# Altium PCB advsensor.PcbDoc (part 2 of 2)
Units mil, origin at the board's own origin, x right, y up, seen from the top; angles counter-clockwise.
Board outline 6000 x 4000 mil, 4 copper layers (Top Layer, Mid-Layer 1, Mid-Layer 2, Bottom Layer); 107 components, 107 nets, 544 pads, 87 vias.
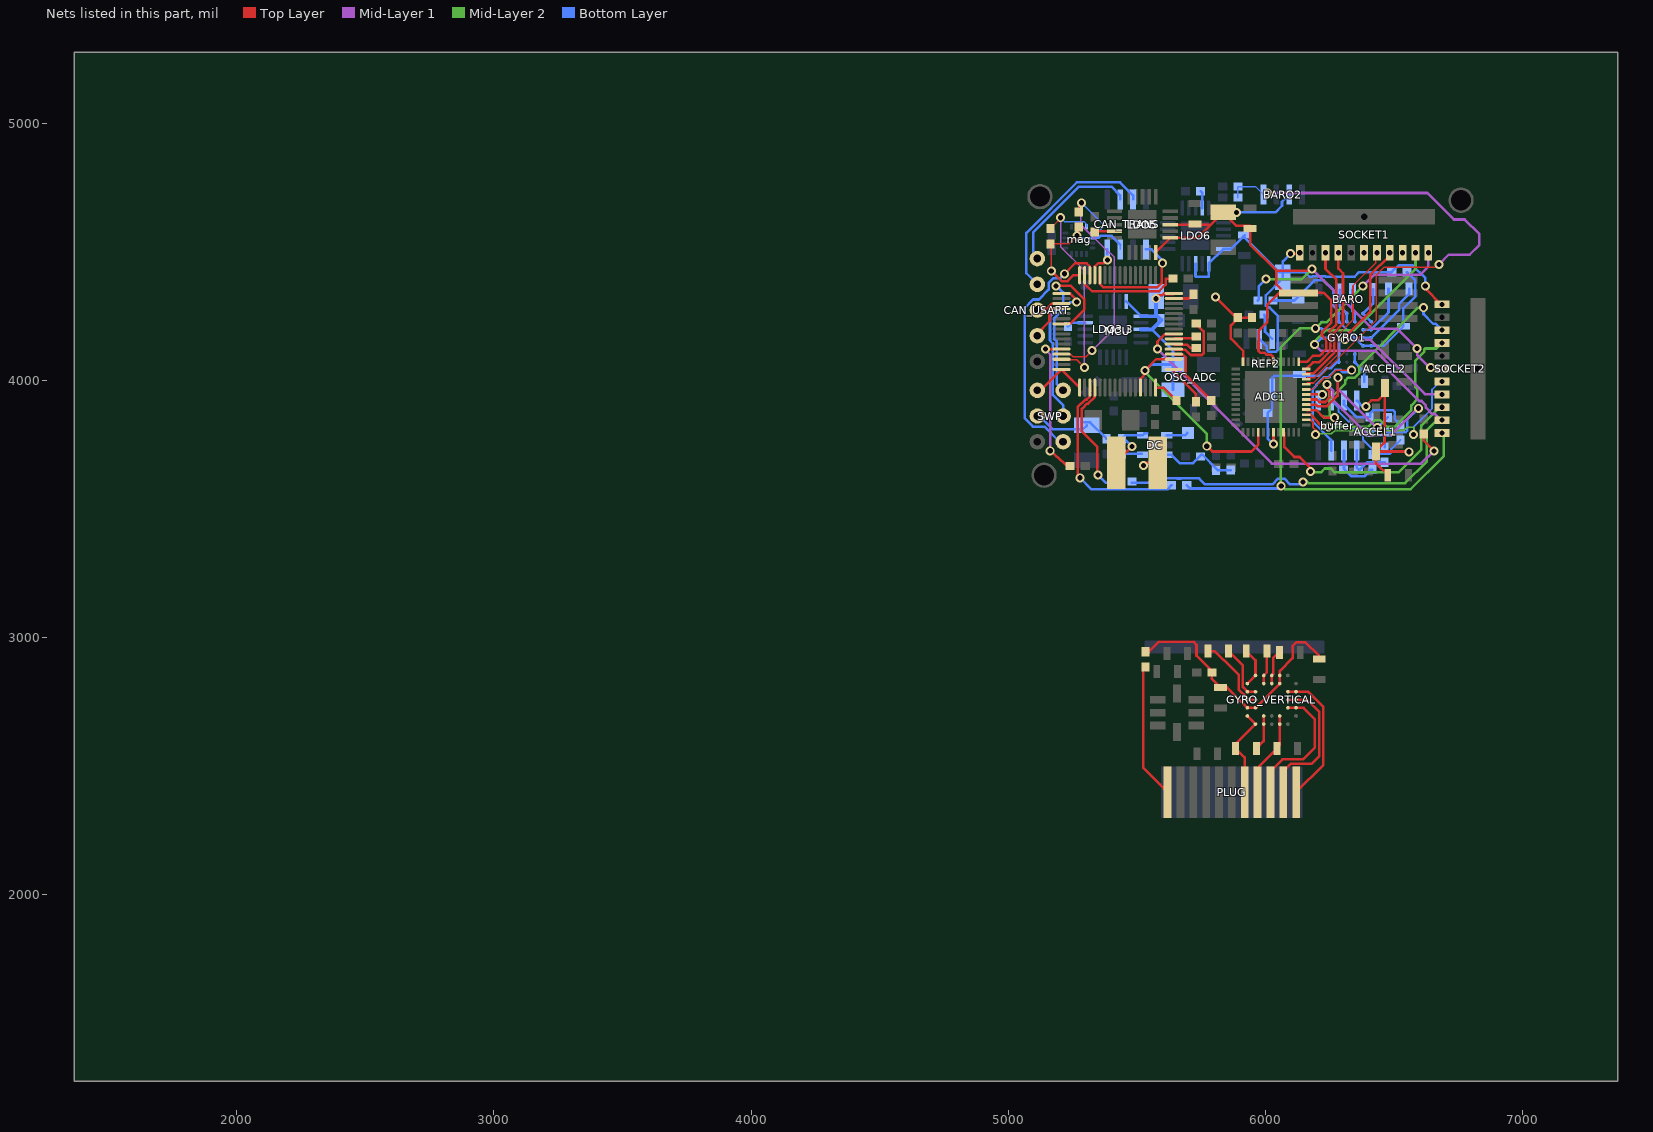
[diagram p4: the nets of this part, all layers, seen from the top]

## Via types
v1: diameter 35, hole 20, Top Layer to Bottom Layer, 87 vias

## Nets (pads, with @x,y where several pads share a name; then routed paths per layer and width w, separated by ;. In a path a pad name is that pad's centre, name@x,y a point inside that pad or via, vN(x,y) a via of type N, cw(c..) or ccw(c..) an arc to the next point about the centre after c; other vN are vias at no path point) (continued)
NetADC1_31: ADC1.31 C_GYRO1_REF.1 C_REF_2.1 GYRO1.E1 GYRO1.E2 REF2.6 SOCKET1.5 SOCKET2.5 | length 1598.1
  Top Layer w10: v1(6030.84,3751.84) ADC1.31@6030.84,3798.19 ; v1(6308,4158) 6299,4158 6406.5,4265.5 6406.5,4409.37 6483,4485.87 SOCKET1.5@6483,4492
  Mid-Layer 1 w10: v1(6308,4158) 6406.93,4158 6619,3945.93 SOCKET2.5@6685.07,3945.93
  Bottom Layer w10: v1(6030.84,3751.84) 6008.47,3774.21 C_REF_2.1@6008.47,3873 6026,3890.53 REF2.6@6026,3967 6026,4009 6034,4017 6209.61,4017 6229.54,4036.93 6229.54,4037.63 6238.92,4047 6254.95,4047 6278.46,4070.51 GYRO1.E1@6284.5,4070.51 GYRO1.E2@6284.5,4102.01 6287,4104.5 6287,4158 v1(6308,4158)
NetADC1_33: ADC1.33 SOCKET2.6 | length 892.9
  Top Layer w10: ADC1.33@6070.21,3798.19 6073.39,3795.01 6073.39,3740.36 6112,3701.75 6132.8,3701.75 6175.26,3659.29 v1(6175.26,3645.75)
  Mid-Layer 2 w10: v1(6175.26,3645.75) 6179.01,3642 6215.22,3642 6230.19,3656.97 6253.81,3656.97 6268.78,3642 6517,3642 6568.5,3693.5 6568.81,3693.5 6605.5,3730.2 6605.5,3824.58 6675.92,3895 SOCKET2.6@6686,3895
NetADC1_38: ADC1.38 SOCKET2.4 | length 790.2
  Top Layer w7: ADC1.38@6157.81,3846.39 6173.8,3846.39 6184.04,3836.15 6184.04,3818.14 6201,3801.19 6201,3786 6197.5,3789.5 v1(6193.89,3789.5)
  Mid-Layer 2 w7: v1(6193.89,3789.5) 6197.5,3789.5 6201,3786 6207,3792 6256.18,3792 6268.68,3804.5 6407.32,3804.5 6423.32,3788.5 6446.75,3788.5 6462.75,3804.5 6538.01,3804.5 6550.51,3817 6575,3817 6575.75,3816.25 v1(6575.75,3788.95)
  Bottom Layer w7: v1(6575.75,3788.95) 6575.75,3816.25 6575,3817 6646.97,3888.97 6646.97,3963.93 6678.04,3995 SOCKET2.4@6686,3995
NetADC1_39: ADC1.39 SOCKET2.3 | length 819.4
  Top Layer w10: ADC1.39@6157.81,3866.08 6175.92,3866.08 6185.54,3856.46 6185.54,3855.16 6220.2,3820.5 6243.5,3820.5 v1(6245,3819)
  Mid-Layer 2 w10: v1(6245,3819) 6397.69,3819 6422.7,3844 6446.31,3844 6471.31,3819 6500.39,3819 6566.5,3885.11 6566.5,3902.8 6590,3926.3 6590,3965.5 6581.5,3974 6581.5,4075.2 6617.5,4111.19 6617.5,4120.81 6620.19,4123.5 6664.5,4123.5 SOCKET2.3@6686,4145
NetADC1_40: ADC1.40 SOCKET2.2 | length 914.2
  Top Layer w10: ADC1.40@6157.81,3885.77 6160.11,3883.47 6198.53,3883.47 6224,3858 ; 6227.5,3854.5 v1(6267.48,3854.5)
  Mid-Layer 2 w10: v1(6267.48,3854.5) 6227.5,3854.5 6224,3858 6248.81,3858 6248.81,3926.18 6310.5,3987.87 6310.5,3999.5 6321,4010 6347.31,4010 6364,4026.69 6364,4050.3 6362.74,4051.57 6362.74,4051.74 6593,4282 v1(6614,4282)
  Bottom Layer w10: v1(6614,4282) 6614,4256.92 6651.92,4219 6662,4219 SOCKET2.2@6686,4195
NetADC1_41: ADC1.41 BUFFER-R4.2 C-Buffer.1 | length 576
  Top Layer w10: ADC1.41@6157.81,3905.46 6196.08,3905.46 6202.07,3899.47 6238.93,3899.47 6280,3940.54 6280,4012 v1(6282,4010)
  Mid-Layer 1 w10: v1(6282,4010) 6280,4012 6280,3967.44 6431.94,3815.5 v1(6434.5,3815.5)
  Bottom Layer w10: BUFFER-R4.2@6404,3797.47 6416.47,3797.47 v1(6434.5,3815.5) C-Buffer.1@6475,3856
NetADC1_42: ADC1.42 BUFFER-R3.2 C-Buffer.2 | length 904.7
  Top Layer w10: ADC1.42@6157.81,3925.15 6199.01,3925.15 6208.7,3915.47 6232.31,3915.47 6249,3932.17 6249,3955.78 6239.04,3965.73 v1(6239.04,3983.5)
  Mid-Layer 1 w10: v1(6239.04,3983.5) 6264,3958.54 6264,3921.37 6398.37,3787 6487.02,3787 6591.02,3891 v1(6595,3891)
  Bottom Layer w10: BUFFER-R3.2@6463,3740.53 6463,3784.47 C-Buffer.2@6475,3796.47 6476.34,3797.81 6544.3,3797.81 6550.75,3804.25 6550.75,3846.75 v1(6595,3891)
NetADC1_43: ADC1.43 buffer.5 | length 100.6
  Top Layer w10: ADC1.43@6157.81,3944.84 6219.63,3944.84 v1(6220.5,3943.97)
  Bottom Layer w10: buffer.5@6205,3922 6226.97,3943.97 v1(6220.5,3943.97)
NetADC1_44: ADC1.44 buffer.3 | length 684.3
  Top Layer w6: ADC1.44@6157.81,3964.53 6182.6,3964.53 6228.07,4010 6244.52,4010 6273.52,4039 v1(6335,4039)
  Top Layer w10: v1@6333.29,4031 6335,4032.71 v1(6335,4039)
  Bottom Layer w10: buffer.3@6255,3727 6255,3768.7 6183,3840.7 6183,3964.56 6198.04,3979.6 6198.04,3983.5 6198.74,3983.5 6227.24,4012 6248.62,4012 6249.95,4013.34 6249.95,4019.38 6271.08,4040.5 6291.81,4040.5 6301.31,4031 6333.29,4031 6335,4032.71 v1(6335,4039)
NetADC1_45: ADC1.45 BARO2.4 C-Baro2.2 R-Baro2.1 | length 2093.3
  Top Layer w6: ADC1.45@6157.81,3984.22 6162.99,3989.4 6186.36,3989.4 6431.01,4234.05 6431.01,4410.13 6460.44,4439.56 6663.56,4439.56 v1(6674,4450)
  Mid-Layer 1 w10: v1(6007,4728) 6629,4728 6732,4625 6774,4625 6831,4568 6831,4526 6793,4488 6712,4488 v1(6674,4450)
  Bottom Layer w6: C-Baro2.2@5892.53,4710 R-Baro2.1@5892.53,4753 5961,4753 BARO2.4@5992,4722
  Bottom Layer w10: v1(6007,4728) v1@6012,4728
NetADC1_46: ADC1.46 SOCKET1.4 | length 621.4
  Top Layer w6: ADC1.46@6157.81,4003.91 6162.99,4009.09 6189.08,4009.09 6281.5,4101.51 6281.5,4176.49 6340,4234.99 6340,4368 6429,4457 6429,4492 SOCKET1.4@6433,4496
NetADC1_47: ADC1.47 SOCKET1.3 | length 556.2
  Top Layer w10: ADC1.47@6157.81,4023.6 6160.99,4026.78 6186.97,4026.78 6267.5,4107.31 6267.5,4170.69 6265.25,4172.93 6265.25,4184.53 6301,4220.28 6301,4416 6283,4434 SOCKET1.3@6283,4496
NetADC1_48: ADC1.48 SOCKET1.2 | length 534
  Top Layer w10: ADC1.48@6157.81,4043.29 6184.02,4069.5 6207.06,4069.5 6251.5,4113.94 6251.5,4164.06 6249.25,4166.31 6249.25,4191.16 6275,4216.9 6275,4391 6233,4433 SOCKET1.2@6233,4496
NetADC-R1_2: ADC-R1.2 MCU.21 | length 251.1
  Top Layer w10: MCU.21@5646.28,4118.32 5688.13,4118.32 5708.2,4098.25 5752.75,4098.25 5759.19,4104.7 5759.19,4190.3 5730.47,4219.02 ADC-R1.2@5730.47,4220
NetADC-R2_2: ADC-R2.2 MCU.23 | length 87
  Top Layer w10: MCU.23@5646.28,4163.25 5723.72,4163.25 ADC-R2.2@5730.47,4170
NetADC-R3_2: ADC-R3.2 MCU.22 | length 89.6
  Top Layer w10: MCU.22@5646.28,4138.01 5695.82,4138.01 5708.83,4125 ADC-R3.2@5730.47,4125
NetADC-R4_1: ADC-R4.1 MCU.16 | length 102.1
  Top Layer w10: MCU.16@5572.64,3971.5 5604.03,3971.5 ADC-R4.1@5654,3921.53
NetADC-R5_1: ADC-R5.1 MCU.17 | length 156.2
  Top Layer w10: MCU.17@5643.5,4042.36 5643.5,4031.8 5729,3946.3 ADC-R5.1@5729,3921.53
NetADC-R6_1: ADC-R6.1 MCU.20 | length 259.9
  Top Layer w10: MCU.20@5643.5,4101.42 5646.28,4098.64 5680.03,4098.64 5689.94,4088.73 5689.94,4020.59 ADC-R6.1@5789,3921.53
Netbuffer_1: BUFFER-R2-1.2 BUFFER-R3.1 buffer.1 | length 190
  Bottom Layer w10: buffer.1@6355,3727 6355,3659.53 BUFFER-R2-1.2@6361.53,3653 6366.51,3653 6394.7,3681.19 6462.72,3681.19 BUFFER-R3.1@6463,3681.47
Netbuffer_2: BUFFER-R1.2 BUFFER-R2-1.1 buffer.2 | length 204.5
  Bottom Layer w10: buffer.2@6305,3727 6305,3655.53 6334.28,3626.25 6383.8,3626.25 6410.02,3652.47 BUFFER-R1.2@6415,3652.47
Netbuffer_6: BUFFER-R1.1 BUFFER-R2-2.2 buffer.6 | length 415.9
  Bottom Layer w8: buffer.6@6255,3921 6284,3892 6284,3876.87 6378.25,3782.62 6378.25,3769.76 6415,3733.01 BUFFER-R1.1@6415,3711.53 6416.28,3712.81 6482.89,3712.81 6488.75,3718.67 6488.75,3732.22 BUFFER-R2-2.2@6524,3767.47
Netbuffer_7: BUFFER-R2-2.1 BUFFER-R4.1 buffer.7 | length 310.8
  Bottom Layer w10: buffer.7@6305,3921 6305,3905.44 6353.92,3856.53 BUFFER-R4.1@6404,3856.53 ; BUFFER-R4.1@6406.47,3859 6406.47,3871.17 6418.5,3883.2 6453.65,3883.2 6454.7,3884.24 6495.3,3884.24 6501.75,3877.8 6501.75,3848.78 BUFFER-R2-2.1@6524,3826.53
NetC1_1: C1.1 GYRO_VERTICAL.A4 GYRO_VERTICAL.B4 | length 300.5
  Top Layer w10: C1.1@5776,2947 5801.94,2947 5837.94,2911 5840,2911 5895.51,2855.49 5895.51,2798.04 5929.51,2764.04 GYRO_VERTICAL.A4@5929.51,2758 GYRO_VERTICAL.B4@5961.01,2758
NetC1_2: C1.2 GYRO_VERTICAL.A5 GYRO_VERTICAL.B5 | length 219.4
  Top Layer w10: C1.2@5856,2947 5911.51,2891.49 5911.51,2807.5 GYRO_VERTICAL.A5@5929.51,2789.5 GYRO_VERTICAL.B5@5961.01,2789.5
NetC2_1: C2.1 GYRO_VERTICAL.A6 GYRO_VERTICAL.B7 | length 154
  Top Layer w10: C2.1@5925,2947 5961.01,2910.99 GYRO_VERTICAL.B7@5961.01,2852.49 GYRO_VERTICAL.A6@5929.51,2820.99
NetC2_2: C2.2 GYRO_VERTICAL.C6 GYRO_VERTICAL.C7 | length 131.2
  Top Layer w10: GYRO_VERTICAL.C6@5992.5,2820.99 GYRO_VERTICAL.C7@5992.5,2852.49 6005,2864.98 C2.2@6005,2947
NetC3_2: C3.2 GYRO_VERTICAL.D6 GYRO_VERTICAL.D7 | length 140.7
  Top Layer w10: GYRO_VERTICAL.D6@6024,2820.99 GYRO_VERTICAL.D7@6024,2852.49 6029.5,2857.99 6029.5,2920.5 C3.2@6057,2948
NetC4_1: C4.1 GYRO_VERTICAL.C1 GYRO_VERTICAL.C2 | length 137.8
  Top Layer w10: C4.1@5964,2569 5992.5,2597.5 GYRO_VERTICAL.C1@5992.5,2663.51 GYRO_VERTICAL.C2@5992.5,2695.01
NetC4_2: C4.2 GYRO_VERTICAL.A2 GYRO_VERTICAL.B1 PLUG.4 | length 355.4
  Top Layer w6: C4.2@5884,2569 C4.2@5884,2586.5
  Top Layer w10: C4.2@5884,2569 5919,2534 PLUG.4@5919,2399 ; C4.2@5884,2586.5 GYRO_VERTICAL.B1@5961.01,2663.51 GYRO_VERTICAL.A2@5929.51,2695.01
NetC_DC3_1: C_DC3.1 DC.3 R_DC2.1 R_DC3.2 | length 301.3
  Bottom Layer w10: DC.3@5616.01,3710.95 5632.62,3710.95 5665.97,3677.61 5718.4,3677.61 5751.75,3710.95 5753.89,3710.95 5814.02,3650.83 C_DC3.1@5864.77,3650.83
NetC_GYRO_AVCC_1: C_GYRO_AVCC.1 C_GYRO_VDD.1 GYRO_VERTICAL.A3 GYRO_VERTICAL.B3 GYRO_VERTICAL.E6 GYRO_VERTICAL.E7 vert5v.2 vert6v.1 | length 1043.5
  Top Layer w6: vert6v.1@5527,2942.53 vert6v.1@5543.53,2942.53 ; 5791.53,2839.47 5791.53,2843 ; C_GYRO_AVCC.1@5825,2806 5850.02,2806
  Top Layer w10: vert6v.1@5543.53,2942.53 5585,2984 5719.2,2984 5731.5,2971.7 5731.5,2929.5 5791.53,2869.47 5791.53,2843 ; 5791.53,2839.47 C_GYRO_AVCC.1@5825,2806 ; 5850.02,2806 GYRO_VERTICAL.A3@5929.51,2726.5 GYRO_VERTICAL.B3@5961.01,2726.5 GYRO_VERTICAL.E6@6055.5,2820.99 GYRO_VERTICAL.E7@6055.5,2852.49 6055.5,2870.5 6105,2920 6105,2967.23 6119.77,2982 6154.23,2982 6209,2927.23 C_GYRO_VDD.1@6209,2917
NetC_GYRO_REF_1: C_GYRO_REF.1 GYRO_VERTICAL.E1 GYRO_VERTICAL.E2 PLUG.5 | length 331.8
  Top Layer w6: C_GYRO_REF.1@6045,2569 C_GYRO_REF.1@6055.5,2579.5
  Top Layer w10: PLUG.5@5969,2399 5969,2493 C_GYRO_REF.1@6045,2569 ; C_GYRO_REF.1@6055.5,2579.5 GYRO_VERTICAL.E1@6055.5,2663.51 GYRO_VERTICAL.E2@6055.5,2695.01
NetC_LDO1-1_2: C_LDO1-1.2 LDO5.14 | length 78.6
  Top Layer w10: C_LDO1-1.2@5336,4576.47 5339.12,4579.59 LDO5.14@5413.31,4579.59
NetC_LDO3-1_2: C_LDO3-1.2 LDO3.3.14 | length 73.1
  Bottom Layer w10: C_LDO3-1.2@5232,4209.53 5245.88,4223.41 LDO3.3.14@5299.31,4223.41
NetC_LDO6-1_2: C_LDO6-1.2 LDO6.14 | length 67.7
  Bottom Layer w10: C_LDO6-1.2@5747.53,4735 5753.41,4729.12 LDO6.14@5753.41,4669.69
NetC_REF_1_1: C_REF_1.1 REF2.3 | length 107
  Bottom Layer w10: C_REF_1.1@5994.53,4255 5998,4251.53 5998,4189 REF2.3@6026,4161
NetCAN_TRANS_1: CAN_TRANS.1 MCU.44 | length 456
  Top Layer w10: MCU.44@5356.1,4408.5 5356.1,4374.75 5368.79,4362.07 5579.64,4362.07 5595.65,4378.08 v1@5595.65,4455
  Bottom Layer w10: CAN_TRANS.1@5535,4509 5557.14,4509 5600,4466.14 v1(5600,4455)
NetCAN_TRANS_4: CAN_TRANS.4 MCU.45 | length 100.2
  Top Layer w10: MCU.45@5336.42,4442.26 5349.1,4454.94 5371.94,4454.94 v1(5385,4468)
  Bottom Layer w10: v1(5385,4468) CAN_TRANS.4@5385,4509
NetCAN_TRANS_6: CAN_TRANS.6 CAN_USART.5 | length 550.9
  Bottom Layer w10: CAN_USART.5@5113,4473 5113,4484 5096.13,4500.87 5096.13,4574.13 5275,4753 5400.56,4753 5435,4718.56 CAN_TRANS.6@5435,4703
NetCAN_TRANS_7: CAN_TRANS.7 CAN_USART.4 | length 750.4
  Bottom Layer w10: CAN_USART.4@5113,4373 5070,4416 5070,4573 5266,4769 5434.56,4769 5485,4718.56 CAN_TRANS.7@5485,4703
NetCAN_USART_2: CAN_USART.2 MCU.52 | length 164.1
  Top Layer w10: CAN_USART.2@5113,4173 5113,4182.41 5160.06,4229.47 5160.06,4265.9 5172.74,4278.58 MCU.52@5206.5,4278.58
NetCAN_USART_3: CAN_USART.3 MCU.51 | length 104
  Top Layer w10: CAN_USART.3@5113,4273 5144.06,4273 5169.33,4298.27 MCU.51@5206.5,4298.27
NetCGyro1-1_1: CGyro1-1.1 GYRO1.A4 GYRO1.B4 | length 283.6
  Bottom Layer w10: GYRO1.B4@6378.99,4165 GYRO1.A4@6410.49,4165 6520,4274.51 6520,4298 6558,4336 CGyro1-1.1@6558,4356
NetCGyro1-1_2: CGyro1-1.2 GYRO1.A5 GYRO1.B5 | length 219
  Bottom Layer w10: GYRO1.B5@6378.99,4196.5 GYRO1.A5@6410.49,4196.5 6478,4264.01 CGyro1-1.2@6478,4356
NetCGyro1-2_1: CGyro1-2.1 GYRO1.A6 GYRO1.B7 | length 154.2
  Bottom Layer w10: GYRO1.A6@6410.49,4227.99 GYRO1.B7@6378.99,4259.49 6418,4298.5 CGyro1-2.1@6418,4353
NetCGyro1-2_2: CGyro1-2.2 GYRO1.C6 GYRO1.C7 | length 128.9
  Bottom Layer w10: CGyro1-2.2@6338,4353 6338,4268.98 GYRO1.C7@6347.5,4259.49 GYRO1.C6@6347.5,4227.99
NetCGyro1-3_2: CGyro1-3.2 GYRO1.D6 GYRO1.D7 | length 135.6
  Bottom Layer w10: CGyro1-3.2@6288,4352 6288,4287.49 GYRO1.D7@6316,4259.49 GYRO1.D6@6316,4227.99
NetCGyro1-4_1: CGyro1-4.1 GYRO1.C1 GYRO1.C2 | length 123.1
  Bottom Layer w10: GYRO1.C2@6347.5,4102.01 GYRO1.C1@6347.5,4070.51 6347.5,4069.45 6384,4032.95 CGyro1-4.1@6384,3994
NetCGyro1-AVCC_1: CGyro1-AVCC.1 CGyro1-VDD.1 GYRO1.A3 GYRO1.B3 GYRO1.E6 GYRO1.E7 main5v.2 main6v.1 | length 978.3
  Bottom Layer w10: main5v.2@6029.53,4310 6111.94,4310 6189.94,4388 6226.06,4388 6263.5,4350.56 6263.5,4289.36 6284.5,4268.36 GYRO1.E7@6284.5,4259.49 GYRO1.E6@6284.5,4227.99 GYRO1.B3@6378.99,4133.5 GYRO1.A3@6410.49,4133.5 6459.5,4133.5 CGyro1-AVCC.1@6536,4210 6536,4279.94 6582.5,4326.44 6582.5,4387.03 main6v.1@6549.53,4420
NetD_DC_1: D_DC.1 DC.1 L_DC.2 | length 310
  Top Layer w10: v1(5526,3668.96) 5537.04,3680 L_DC.2@5580.71,3680
  Bottom Layer w10: v1(5526,3668.96) 5534.96,3668.96 5563.27,3697.27 5563.27,3745.61 5589.8,3772.15 5602.41,3772.15 DC.1@5616.01,3785.76 5686.46,3785.76 D_DC.1@5696.06,3795.35
NetDC_4: DC.4 R_DC1.1 | length 76.9
  Bottom Layer w10: R_DC1.1@5441.77,3713.83 DC.4@5518.65,3713.83
NetGYRO1_F4: GYRO1.F4 GYRO1.G4 R-S1-ST1.1 SOCKET1.7 SOCKET2.7 | length 2709.9
  Mid-Layer 1 w10: v1(6191,4139) 6216,4114 6428.31,4114 6486.5,4055.8 6486.5,4030.42 6597.42,3919.5 6606.81,3919.5 6623.5,3902.8 6623.5,3893.42 6647.92,3869 6658,3869 SOCKET2.7@6682,3845
  Mid-Layer 2 w10: v1(6146,3605) 6161,3605 6166.03,3599.97 6542.97,3599.97 6626.03,3683.03 6626.03,3804.03 6667,3845 SOCKET2.7@6682,3845 ; v1@6185.69,4139 v1(6191,4139) 6191,4151 6234,4194 6344,4194 6583,4433 SOCKET1.7@6583,4492
  Bottom Layer w10: R-S1-ST1.1@5480.53,3602 5595.45,3602 5612.2,3618.75 5656.75,3618.75 5657.37,3618.12 5670.63,3618.12 5671.25,3618.75 5741.32,3618.75 5764.82,3595.25 6026.95,3595.25 6049.19,3617.5 6072.81,3617.5 6095.05,3595.25 6141.25,3595.25 v1@6153,3607 ; v1(6191,4139) GYRO1.G4@6217,4165 ; GYRO1.G4@6221.51,4165 GYRO1.F4@6253.01,4165
NetGYRO1_F5: GYRO1.F5 GYRO1.G5 R-S1-ST2.1 SOCKET1.8 SOCKET2.8 | length 2511
  Mid-Layer 1 w10: v1(6378,4366) 6422,4410 6600,4410 6633,4443 SOCKET1.8@6633,4492
  Mid-Layer 2 w10: v1(6378,4366) 6237,4225 6217,4225 v1(6194,4202) 6132.69,4202 6059.5,4128.81 6059.5,3590.85 6073.85,3576.5 6564.5,3576.5 6692,3704 6692,3785 SOCKET2.8@6682,3795
  Bottom Layer w10: R-S1-ST2.1@5693.53,3592 5706.28,3579.25 v1@6061,3579.25 ; v1(6194,4202) 6216.01,4202 GYRO1.G5@6221.51,4196.5 GYRO1.F5@6253.01,4196.5
  other v1: 6061,3589
NetGYRO_VERTICAL_F3: GYRO_VERTICAL.F3 GYRO_VERTICAL.G3 PLUG.6 | length 524.5
  Top Layer w10: PLUG.6@6019,2399 6019,2479.56 6065.44,2526 6146,2526 6191,2571 6191,2683 6147.5,2726.5 GYRO_VERTICAL.G3@6118.49,2726.5 GYRO_VERTICAL.F3@6086.99,2726.5
NetGYRO_VERTICAL_F4: GYRO_VERTICAL.F4 GYRO_VERTICAL.G4 PLUG.7 | length 558.1
  Top Layer w10: PLUG.7@6069,2399 6069,2479.56 6099.44,2510 6180,2510 6209,2539 6209,2710 6161,2758 GYRO_VERTICAL.G4@6118.49,2758 GYRO_VERTICAL.F4@6086.99,2758
NetGYRO_VERTICAL_F5: GYRO_VERTICAL.F5 GYRO_VERTICAL.G5 PLUG.8 | length 537
  Top Layer w10: GYRO_VERTICAL.F5@6086.99,2789.5 GYRO_VERTICAL.G5@6118.49,2789.5 6164.5,2789.5 6225,2729 6225,2505 PLUG.8@6119,2399
Netmag_1: mag.1 MCU.61 SCL_PU.2 | length 1029.9
  Top Layer w6: MCU.61@5206.5,4101.42 5241.11,4101.42 5251.02,4091.5 5301.5,4091.5 v1(5326,4116) v1@5335,4107 ; SCL_PU.2@5274,4654.53 5274,4679 v1(5285,4690)
  Mid-Layer 1 w6: v1(5285,4690) 5282,4687 5282,4605 5392.5,4494.5 5395.98,4494.5 5411.5,4478.98 5411.5,4201.5 v1(5326,4116)
  Bottom Layer w6: v1(5285,4690) 5367,4608 5367,4595 5345,4573 mag.1@5328,4573
Netmag_16: mag.16 MCU.62 SDA_PU.2 | length 912
  Top Layer w6: SDA_PU.2@5164,4589.53 5203,4628.53 v1(5203,4632) v1@5195,4632 ; MCU.62@5206.5,4081.73 5208.73,4079.5 5266.5,4079.5 v1(5296,4050)
  Mid-Layer 1 w6: v1(5203,4632) 5203,4519.48 5296,4426.48 v1(5296,4050)
  Bottom Layer w6: v1(5203,4632) 5218.06,4616.94 5274.64,4616.94 5274.85,4616.73 5275.06,4616.94 5294.33,4616.94 5304.38,4606.89 mag.16@5304.38,4596.62
NetMCU_3: MCU.3 R-S1-ST2.2 | length 759
  Top Layer w10: v1(5278,3621) 5269.7,3629.3 5269.7,3895.55 5299.21,3925.06 5304.05,3925.06 5316.73,3937.74 MCU.3@5316.73,3971.5
  Bottom Layer w10: v1@5279,3621 v1(5278,3621) 5323,3576 5618.47,3576 R-S1-ST2.2@5634.47,3592
NetMCU_4: MCU.4 R-S1-ST1.2 | length 478.2
  Top Layer w10: MCU.4@5336.42,3971.5 5336.42,3934.8 5310.68,3909.06 5305.84,3909.06 5285.7,3888.93 5285.7,3801.07 5346,3740.78 5346,3632 v1(5348,3632)
  Bottom Layer w10: v1@5346,3632 v1(5348,3632) 5378,3602 R-S1-ST1.2@5421.47,3602
NetMCU_24: MCU.24 R-ST-acc.2 | length 1465.7
  Top Layer w10: v1(5580,4121.26) 5580,4150.4 5608.85,4179.25 5642.6,4179.25 MCU.24@5643.5,4180.16 ; R-ST-acc.2@6615,3790.47 6615,3765.06 v1(6654.53,3725.53)
  Mid-Layer 1 w10: v1(5580,4121.26) 6025.18,3676.08 6421.64,3676.08 6605.08,3676.08 v1(6654.53,3725.53)
NetMCU_31: MCU.31 R10.1 | length 83.4
  Top Layer w10: MCU.31@5643.5,4317.95 5703.42,4317.95 R10.1@5720,4334.53
NetMCU_46: MCU.46 SWP.4 | length 995.7
  Top Layer w10: v1(5219,4414) 5259.94,4454.94 5304.05,4454.94 5316.73,4442.26 MCU.46@5316.73,4408.5
  Bottom Layer w10: SWP.4@5213,3761 5199.37,3761 5140.37,3820 5096.02,3820 5064,3852.02 5064,4281.98 5096.02,4314 5118.69,4314 5156.85,4352.15 5156.85,4378.85 5174.5,4396.5 5201.5,4396.5 v1(5219,4414)
NetMCU_47: MCU.47 R11.1 | length 422.6
  Top Layer w10: MCU.47@5297.05,4408.5 5297.05,4374.75 5325.73,4346.07 5586.27,4346.07 5611.65,4371.45 5611.65,4394.08 5612.57,4395 R11.1@5640.47,4395
NetMCU_49: MCU.49 SWP.6 | length 486.4
  Top Layer w10: MCU.49@5206.5,4337.64 5240.25,4337.64 5266,4311.88 v1(5266,4304)
  Bottom Layer w10: SWP.6@5213,3961 5188.5,3985.5 5188.5,4150.6 5178,4161.1 5178,4240.63 5241.37,4304 v1(5266,4304)
NetMCU_55: MCU.55 SWP.5 | length 845.4
  Top Layer w10: v1(5185.35,4367.04) 5186.3,4368 5242.31,4368 5294.5,4315.81 5294.5,4273.78 5240.25,4219.53 MCU.55@5206.5,4219.53
  Bottom Layer w10: v1(5185.35,4367.04) 5187.96,4367.04 5213,4342 5213,4298.25 5162,4247.25 5162,4154.48 5172.5,4143.98 5172.5,3978.48 5172,3977.98 5172,3944.02 5213,3903.02 SWP.5@5213,3861
NetMCU_60: MCU.60 R-BOOT0.1 | length 575.6
  Top Layer w10: v1(5144,4121) 5206.39,4121 MCU.60@5206.5,4121.1 ; v1(5163,3726) 5235.17,3660.39 R-BOOT0.1@5248,3661
  Mid-Layer 1 w10: v1(5144,4121) 5143,4120 5163,4100 ; v1(5163,3726) 5163,4099
NetPLUG_6V: PLUG.6V vert6v.2 | length 530
  Top Layer w10: vert6v.2@5534,2885.47 5524,2875.47 5524,2494 PLUG.6V@5619,2399
NetSOCKET1_6: SOCKET1.6
VCC: C_DC1.2 C_DC2.2 DC.5 L_DC.1 R_DC1.2 SWP.2 | length 647.6
  Top Layer w10: L_DC.1@5419.29,3680 5477.42,3738.13 5481.02,3738.13 v1(5481,3743)
  Bottom Layer w10: SWP.2@5113,3861 5122,3861 5174.22,3808.78 5289.26,3808.78 C_DC1.2@5305,3824.52 ; C_DC1.2@5296,3836.52 5318.13,3836.52 C_DC2.2@5381.77,3772.88 ; C_DC2.2@5384.64,3772.88 R_DC1.2@5441.77,3772.88 ; v1(5481,3743) 5481,3738.14 5481.02,3741.98 5450.12,3772.88 R_DC1.2@5441.77,3772.88 ; DC.5@5540,3793.29 5529.06,3793.29 DC.5@5521.52,3785.76 5454.64,3785.76 R_DC1.2@5441.77,3772.88
VCC-3.3: ADC1.12 ADC1.28 ADC-R7.2 ADC-R8.2 C_LDO3-2.2 C_LDO3-3.2 CAN_TRANS.3 LDO3.3.1 LDO3.3.3 LDO3.3.20 mag.2 mag.14 MCU.1 MCU.13 MCU.19 MCU.32 MCU.48 MCU.64 OSC_ADC.1 OSC_ADC.4 SCL_PU.1 SDA_PU.1 SWP.3 | length 2959.6
  Top Layer w6: SDA_PU.1@5164,4530.47 SDA_PU.1@5167.47,4530.47 ; v1@5167.47,4425 SDA_PU.1@5167.47,4530.47 ; SCL_PU.1@5274,4595.47 5274,4569 v1(5266.71,4561.71) 5235.47,4530.47 SDA_PU.1@5167.47,4530.47
  Top Layer w10: SWP.3@5113,3961 5125.13,3961 MCU.64@5206.5,4042.36 ; v1@5167.47,4425 5183.97,4408.5 5184.19,4408.5 5207.19,4385.5 5230.81,4385.5 5253.81,4408.5 MCU.48@5277.36,4408.5 ; 5227.36,4021.5 MCU.64@5206.5,4042.36 ; MCU.1@5277.36,3971.5 MCU.64@5206.5,4042.36 ; MCU.13@5513.58,4005.25 v1@5540.17,4031.83 ; v1(5531,4038) 5574.73,4081.73 MCU.19@5643.5,4081.73 ; v1@5574.48,4330.07 5597.85,4330.07 5605.42,4337.64 MCU.32@5643.5,4337.64 5640.72,4334.86 5606.97,4334.86 ; v1(5771.5,3743.6) 5772.4,3743.6 5793,3723 5945,3723 5971.79,3749.79 ADC1.28@5971.79,3798.19 ; v1(5805,4324) ADC-R7.2@5890.53,4238.47 ; ADC1.12@5912.73,4071.81 5912.73,4114.72 5865.25,4162.2 5865.25,4213.19 ADC-R7.2@5890.53,4238.47 ; ADC-R8.2@5947,4243.53 ADC-R7.2@5892,4243.53 5892,4239.94 ADC-R7.2@5890.53,4238.47
  Mid-Layer 1 w6: v1(5167,4425) 5167,4413 v1@5171,4417
  Mid-Layer 2 w10: v1(5531,4038) 5531,4031.7 5771.5,3791.19 v1(5771.5,3743.6) v1@5772.4,3743.6
  Bottom Layer w6: v1(5266.71,4561.71) 5266,4561 5273.69,4553.31 mag.2@5328,4553.31 ; CAN_TRANS.3@5435,4509 CAN_TRANS.3@5435,4527
  Bottom Layer w10: v1@5265.01,4563.41 mag.14@5265.01,4596.62 ; mag.2@5328,4553.31 5350.73,4553.31 5358.41,4561 5401,4561 CAN_TRANS.3@5435,4527 ; LDO3.3.20@5458.76,4306.09 LDO3.3.1@5515.84,4249 ; v1(5531,4038) 5533.34,4038 5556.55,4061.21 OSC_ADC.1@5640.1,4061.21 ; 5558.88,4197.82 5640.1,4116.59 OSC_ADC.1@5640.1,4061.21 ; C_LDO3-3.2@5594,4235.4 C_LDO3-3.2@5595.23,4234.17 ; OSC_ADC.4@5640.1,3962.79 OSC_ADC.1@5640.1,4061.21
  Bottom Layer w15: LDO3.3.3@5515.84,4197.82 5558.88,4197.82 C_LDO3-3.2@5595.23,4234.17 ; LDO3.3.1@5515.84,4249 5580.4,4249 ; C_LDO3-2.2@5574.48,4326 v1(5574.48,4317) 5574.48,4254.92 5580.4,4249 ; C_LDO3-3.2@5594,4233 5594,4235.4 5580.4,4249
VCC-5.0: ACCEL1.8 ACCEL2.8 ADC1.1 ADC1.6 BARO2.2 BARO.2 buffer.8 C_LDO1-2.2 C_LDO1-3.2 C_LDO1-4.2 C_LDO1-5.2 LDO5.1 LDO5.3 LDO5.20 main5v.1 SOCKET1.VCC SOCKET2.VCC | length 3882.9
  Top Layer w10: LDO5.20@5572.76,4496.91 LDO5.1@5629.84,4554 5736.48,4554 5787.66,4605.18 ; LDO5.3@5629.84,4605.18 5787.66,4605.18 ; v1(5886.48,4652.52) C_LDO1-2.2@5835,4652.52 ; ADC1.6@6030.84,4071.81 6027.67,4074.98 6027.67,4093.1 6021.23,4099.54 6003.11,4099.54 5995.4,4107.25 5979.04,4107.25 5972.6,4113.7 5972.6,4154.3 5974,4155.71 5974,4194 6007,4227 6007,4294 BARO.2@6053,4340 ; ADC1.1@6129.27,4071.81 6160.76,4071.81 6183.45,4094.5 6209.43,4094.5 6235.5,4120.57 6235.5,4157.43 6219.5,4173.43 6219.5,4187.19 6256,4223.69 6256,4311 6227,4340 BARO.2@6128,4340 6073.86,4340 6042,4371.86 6042,4426 ; v1@6174,4426 6042,4426 ; v1(6390,3897.74) 6390,3900.56 6410.94,3921.5 6436.81,3921.5 6455.87,3940.57 6455.87,3966.43 6458.44,3969 ACCEL2.8@6464,3969 6463,3968 6463,3828.44 6463,3818.56 6463,3758 ACCEL1.8@6429,3724 ; C_LDO1-4.2@6475,3631 6429,3677 ACCEL1.8@6429,3724 ; v1@6557,3723 6430,3723 ACCEL1.8@6429,3724 ; v1@6586,4120 v1(6589,4123) ; v1(6642,4049) 6638,4045 SOCKET2.VCC@6682,4045 ; 5787.66,4605.18 C_LDO1-2.2@5835,4652.52 ; C_LDO1-2.2@5835,4652.52 5887.05,4600.47 5940,4600.47 5940,4528 6042,4426
  Mid-Layer 1 w10: v1(6181,4433) 6413,4201 6511,4201 v1(6589,4123) 6589,4097.69 6637.69,4049 v1(6642,4049)
  Mid-Layer 2 w10: v1(6002,4393) 6141,4393 v1(6181,4433) v1@6183,4431
  Bottom Layer w10: v1(5886.48,4652.52) 6038.08,4652.52 6064,4678.44 6064,4694 BARO2.2@6092,4722 ; main5v.1@5970.47,4310 5973.4,4312.93 5973.4,4364.4 v1(6002,4393) ; buffer.8@6355,3921 6381,3895 6387.26,3895 v1(6390,3897.74)
  other v1: 6557,3722
VCC-6.0: C_LDO6-2.2 C_LDO6-3.2 LDO6.1 LDO6.3 LDO6.20 main6v.2 REF2.2 SOCKET1.6V SOCKET2.6V | length 1855.5
  Top Layer w10: v1(6097,4492) SOCKET1.6V@6133,4492 ; v1(6621,4366) 6621,4356 SOCKET2.6V@6682,4295
  Bottom Layer w10: LDO6.3@5727.82,4453.16 5727.82,4404.18 5729.79,4402.21 5750.62,4402.21 5750.84,4402 5779,4402 LDO6.1@5779,4453.16 LDO6.20@5836.09,4510.24 5865.24,4510.24 C_LDO6-3.2@5918.5,4563.5 ; C_LDO6-3.2@5914,4559 6053,4420 6151.31,4420 ; REF2.2@5976,4161 6004,4133 6004,4117.44 6010.44,4111 6041.56,4111 6048,4117.44 6048,4250.55 6015.3,4283.25 6007.25,4283.25 6000.81,4289.7 6000.81,4330.3 6067.52,4397.01 C_LDO6-2.2@6067.52,4401 6067.52,4462.52 v1(6097,4492) ; 6152.5,4421.19 6171.19,4402.5 6181.82,4402.5 6183.32,4404 6232.68,4404 6234.18,4402.5 6345.81,4402.5 6363.31,4420 main6v.2@6490.47,4420 6517.22,4446.75 6571.8,4446.75 6621,4397.55 v1(6621,4366)
pads on no net: ACCEL1.2 ACCEL1.4 ACCEL1.5 ACCEL2.2 ACCEL2.4 ACCEL2.5 ACCEL_VERTICAL.2 ACCEL_VERTICAL.4 ACCEL_VERTICAL.5 ADC1.7 ADC1.8 ADC1.9 ADC1.14 ADC1.15 ADC1.16 ADC1.17 ADC1.18 ADC1.19 ADC1.20 ADC1.21 BARO2.1 BARO.1 BARO.5 BARO.6 BARO.7 BARO.8 CAN_TRANS.5 CAN_TRANS.8 GYRO1.D1 GYRO1.D2 GYRO_VERTICAL.D1 GYRO_VERTICAL.D2 LDO3.3.0 LDO3.3.2 LDO3.3.4 LDO3.3.5 LDO3.3.6 LDO3.3.9 LDO3.3.10 LDO3.3.17 LDO3.3.18 LDO3.3.19 LDO5.0 LDO5.2 LDO5.4 LDO5.5 LDO5.8 LDO5.9 LDO5.11 LDO5.12 LDO5.17 LDO5.18 LDO5.19 LDO6.0 LDO6.2 LDO6.4 LDO6.5 LDO6.8 LDO6.12 LDO6.17 LDO6.18 LDO6.19 mag.3 mag.4 mag.5 mag.6 mag.7 mag.15 MCU.2 MCU.7 MCU.8 MCU.9 MCU.10 MCU.11 MCU.14 MCU.15 MCU.25 MCU.26 MCU.27 MCU.28 MCU.29 MCU.30 MCU.33 MCU.34 MCU.35 MCU.36 MCU.37 MCU.38 MCU.39 MCU.40 MCU.41 MCU.42 MCU.43 MCU.50 MCU.53 MCU.54 MCU.56 MCU.57 MCU.58 MCU.59 PLUG.FREE REF2.1 REF2.5 REF2.7 REF2.8 SOCKET1.FREE SOCKET2.FREE

## Polygon pours and split planes (outlines as drawn)
GND-5.0 on Bottom Layer "Top Layer-No Net" (solid, pour order 25): 5048,4785 6875,4785 6875,3560 6088,3560 6088,4138 6093,4143 6090.59,4140.59 5851.49,4140.59 5851.49,4454.49 5852,4455 5842,4465 5048,4465
GND-5.0 on Bottom Layer "Top Layer-No Net" (solid, pour order 18): 5858.5,4141.22 5847.5,4140.22 5848.5,3562.22 6080,3565.22 6078.5,4141.22
GND-3.3 on Bottom Layer "Top Layer-No Net" (solid, pour order 22): 5048,4460 5841,4460 5842,4459 5845,4456 5845,3915 5049,3915 5048,3914
GND-DC on Bottom Layer "Top Layer-No Net" (solid, pour order 21): 5048,3914 5048,3560 5931,3560 5930.5,3797.5 5815.5,3912.5
no net on Bottom Layer "Top Layer-No Net" (solid, pour order 26): 5500,3004 6246,3004 6246,2283 5500,2283
GND-5.0 on Top Layer "Top Layer-No Net" (solid, pour order 28): 5048,4785 5048,4467 5846,4467 5850,4463 5848,4461 5848,3562 6873,3562 6875,3560 6875,4785
GND-3.3 on Top Layer "Top Layer-No Net" (solid, pour order 27): 5048,4463 5048,3560 5848,3560 5848,4457 5847,4458
Netaccel_c1_1 on Top Layer "Top Layer-No Net" (solid, pour order 24): 5500,3004 6246,3004 6246,2283 5500,2283
GND-ADC-D on Mid-Layer 1 "Top Layer-No Net" (solid, pour order 17): 5851,4143 5840,4142 5841,3564 6072.5,3567 6072.5,4135.98 5865,4143
GND-5.0 on Mid-Layer 1 "Top Layer-No Net" (solid, pour order 19): 5840,4460 5844.14,4187.19 5849.5,4180 5849.5,4145.74 6090,4148 6085,3560 6875,3560 6875,4785 5048,4785 5048,4456
GND-3.3 on Mid-Layer 1 "Top Layer-No Net" (solid, remove dead copper, pour order 15): 5137,4460 5844.04,4458.35 5845.96,3570.65 5048,3560 5048,4460
VCC-3.3 on Mid-Layer 2 "Top Layer-No Net" (solid, pour order 20): 5048,4456 5052.96,4460.96 5845,4460.96 5845,3884 5846,3883 5843,3886 5048,3886
VCC-5.0 on Mid-Layer 2 "Top Layer-No Net" (solid, pour order 23): 5845,4467.46 5857,3570 6871.97,3568.6 6867.97,4787.83 5048,4785 5048,4469
GND-6.0 on Mid-Layer 2 "Top Layer-No Net" (solid, pour order 16): 6143,3794 5954,3794 5947,3794 5852,3889 5845,3896 5845,4471 6147.26,4471 6151.18,4474.92

## Keep-outs
Keep-Out Layer:
  lines w10: 5048,3560 6875,3560 6875,4785 5048,4785 5048,3560 ; 5500,2283 5500,3004 6246,3004 6246,2283 5500,2283

## Silkscreen, mask and mechanical layers (free items; w line width, h text height)
Bottom Overlay:
  text "JLCJLCJLCJLC" at 6579,4695 h35

## Text inside footprints (layer, text, board x,y; h text height)
ADC1: Top Overlay "*" at 6154.11,4113.54 h50 r270; Mechanical 1 "*" at 6154.11,4113.54 h50 r270
BARO2: Bottom Overlay "*" at 6167,4739 h50 r270
buffer: Bottom Overlay "*" at 6380,3744 h50 r270
CAN_TRANS: Bottom Overlay "*" at 5560,4526 h50 r270
GYRO1: Mechanical 1 "A" at 6410.49,4001 h50 r270; Mechanical 1 "G" at 6221.51,4001 h50 r270; Mechanical 1 "1" at 6480,4070.51 h50 r180; Mechanical 1 "7" at 6480,4259.49 h50 r180; Bottom Overlay "A" at 6410.49,4001 h50 r270; Bottom Overlay "G" at 6221.51,4001 h50 r270; Bottom Overlay "1" at 6480,4070.51 h50 r180; Bottom Overlay "7" at 6480,4259.49 h50 r180
GYRO_VERTICAL: Top Overlay "7" at 5860,2852.49 h50 r180; Top Overlay "1" at 5860,2663.51 h50 r180; Top Overlay "G" at 6118.49,2594 h50 r90; Top Overlay "A" at 5929.51,2594 h50 r90; Mechanical 1 "7" at 5860,2852.49 h50 r180; Mechanical 1 "1" at 5860,2663.51 h50 r180; Mechanical 1 "G" at 6118.49,2594 h50 r90; Mechanical 1 "A" at 5929.51,2594 h50 r90
REF2: Bottom Overlay "*" at 5901,4144 h50 r90